# EAGLE board CAN_Steering_Wheel_board (EAGLE 7.6.0)
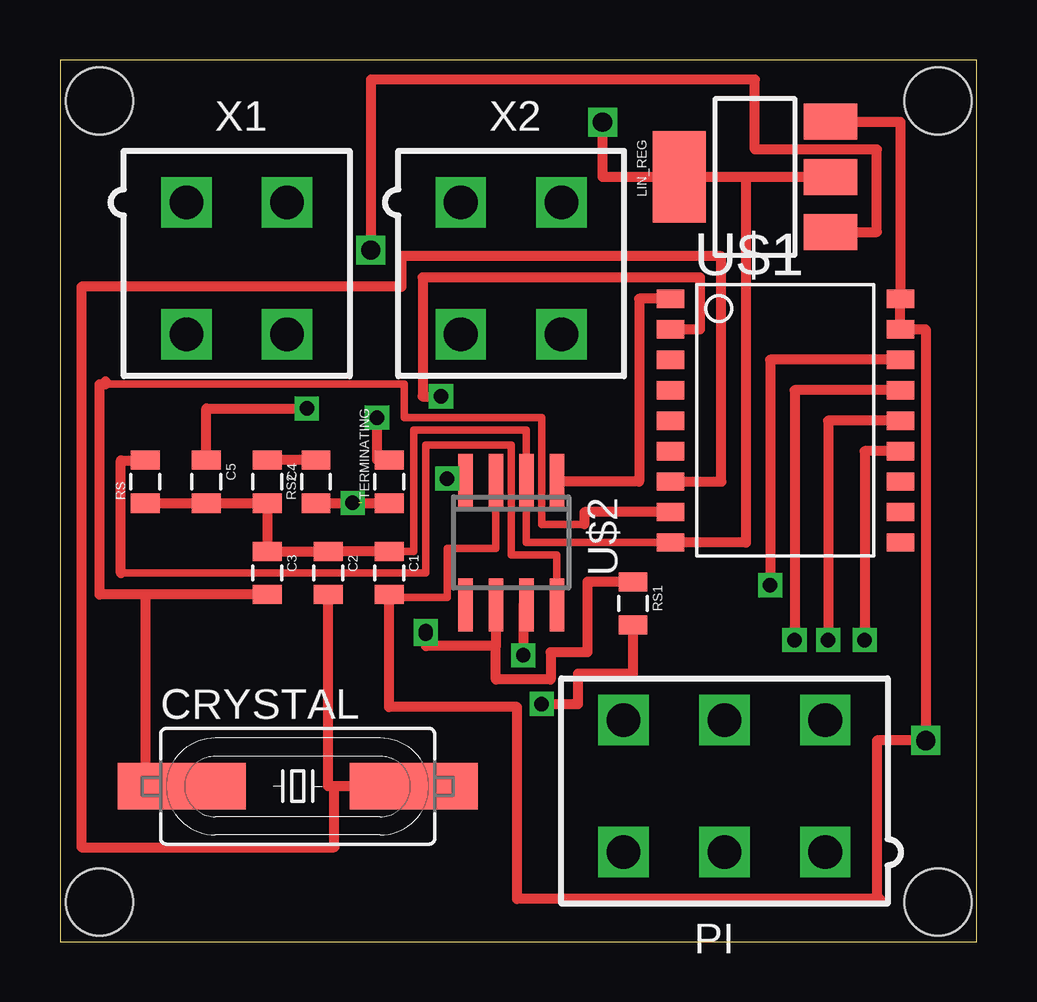
[diagram p0: board, top side]
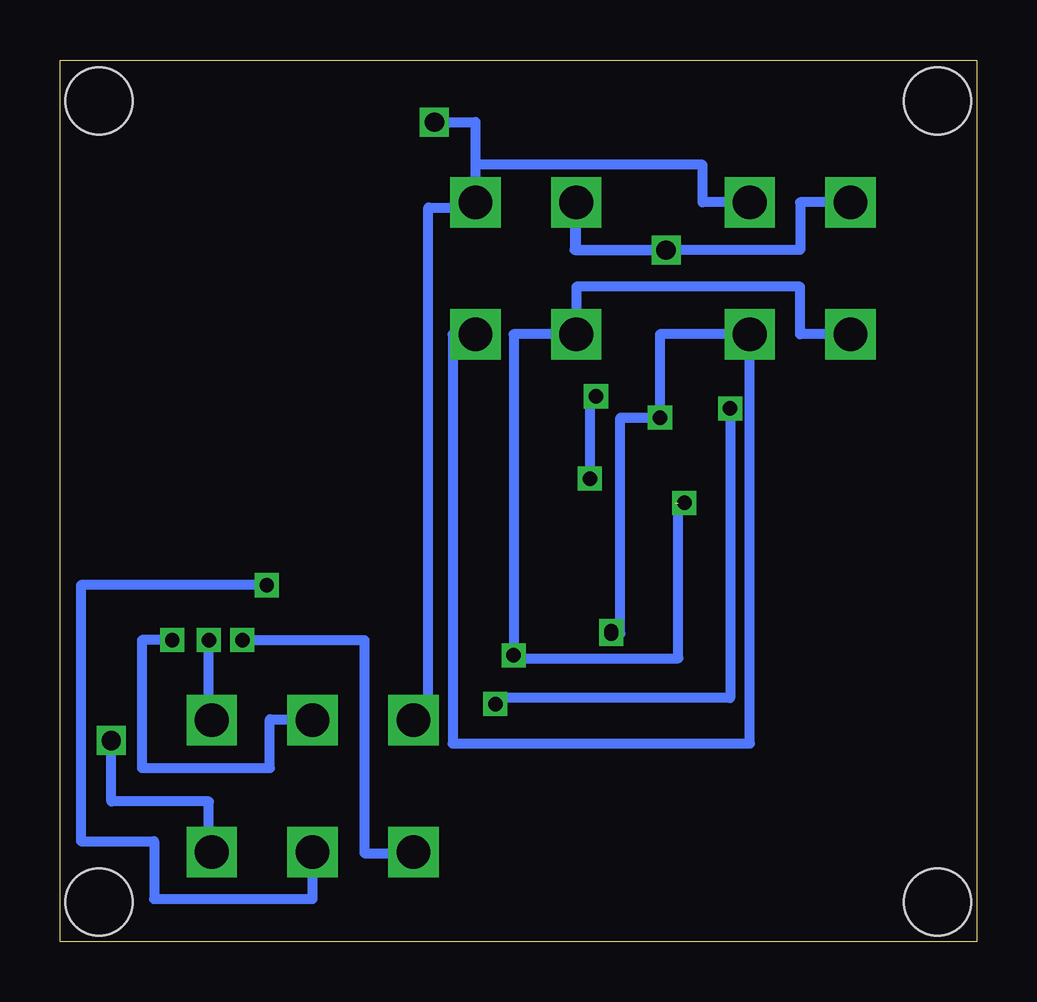
[diagram p1: board, bottom side, seen from below]

Size 38.21 x 36.75 mm. Coordinates in mm from the lower left corner, seen from the top.
Outline: 0,0 38.21,0 38.21,36.75 0,36.75 0,0
Copper layers (1*16): Top 0.035mm / dielectric 1.5mm / Bottom 0.035mm
Design rules "default": minimum track width 10mil, minimum drill 24mil, track to track 8mil, track to pad 8mil, pad to pad 8mil, via to via 8mil, smd to smd 8mil, copper to edge 40mil, drill to drill 8mil, minimum pad ring 10mil, minimum via ring 8mil, stop-mask expansion 4mil, vias tented up to drill 0mil, thermal gap 10mil
Holes 2.8 mm at 1.65,35.05 36.58,35.05 1.65,1.65 36.58,1.65

## Footprints (pad centres in the part's own frame; a part is rotated, then mirrored left to right if it is on the bottom)
0805 = smd 0.8 x 1.2: 1 -0.9,0; 2 0.9,0
HC49UP = smd 5.334 x 1.93: 1 -4.826,0; 2 4.826,0
SOT223 = smd 1.5 x 2.235: 1 -2.3,-3.15; 2 0,-3.15; 3 2.3,-3.15 | smd 3.8 x 2.2: 4 0,3.15
MINIFIT_5566-6 = drill 1.4 square: 1 4.2,-2.75; 2 0,-2.75; 3 -4.2,-2.75; 4 4.2,2.75; 5 0,2.75; 6 -4.2,2.75
SOIC-18W = smd 0.762 x 1.143: 1 -5.08,-4.788; 2 -3.81,-4.788; 3 -2.54,-4.788; 4 -1.27,-4.788; 5 0,-4.788; 6 1.27,-4.788; 7 2.54,-4.788; 8 3.81,-4.788; 9 5.08,-4.788; 10 5.08,4.788; 11 3.81,4.788; 12 2.54,4.788; 13 1.27,4.788; 14 0,4.788; 15 -1.27,4.788; 16 -2.54,4.788; 17 -3.81,4.788; 18 -5.08,4.788
SOIC-08 = smd 0.6 x 2.2: 1 -1.905,-2.6; 2 -0.635,-2.6; 3 0.635,-2.6; 4 1.905,-2.6; 5 1.905,2.6; 6 0.635,2.6; 7 -0.635,2.6; 8 -1.905,2.6
MINIFIT_5566-4 = drill 1.4 square: 1 2.1,-2.75; 2 -2.1,-2.75; 3 2.1,2.75; 4 -2.1,2.75

## Placement (x,y rotation side)
C1  0.1uF  [0805]  13.72,15.37 270 top
C2  22pF  [0805]  11.18,15.37 270 top
C3  22pF  [0805]  8.64,15.37 270 top
C4  560pF  [0805]  8.64,19.18 270 top
C5  560pF  [0805]  6.1,19.18 270 top
CRYSTAL  16MHz  [HC49UP]  9.91,6.48 0 top
LIN_REG  [SOT223]  28.96,31.88 90 top
PI  MINIFIT_5566-6  [MINIFIT_5566-6]  27.69,6.48 0 top
RS  4.7k  [0805]  3.56,19.18 90 top
RS1  100  [0805]  23.88,14.1 270 top
RS2  100  [0805]  10.67,19.18 90 top
TERMINATING  120  [0805]  13.72,19.18 90 top
U$1  MCP2515SMD  [SOIC-18W]  30.23,21.72 270 top
U$2  MCP2551  [SOIC-08]  18.8,16.64 180 top
X1  MINIFIT_5566-4  [MINIFIT_5566-4]  7.37,28.07 180 top
X2  MINIFIT_5566-4  [MINIFIT_5566-4]  18.8,28.07 180 top

## Library data of the parts
C1-C5 CRYSTAL LIN_REG RS RS1 RS2 TERMINATING U$1 U$2 = HyTechDevices
PI = HyTechDevices; MPN: 95566-61002; OC_FARNELL: unknown; OC_NEWARK: 22K8620
X1 X2 = HyTechDevices; OC_FARNELL: unknown; OC_NEWARK: unknown

## Nets
5V: C1.2 LIN_REG.3 PI.1 U$1.17 U$1.18 U$2.3
12V: LIN_REG.1 X1.1 X2.1
CANH: RS2.1 TERMINATING.1 U$2.7 X1.3 X2.3
CANL: RS1.1 TERMINATING.2 U$2.6 X1.4 X2.4
GND: C1.1 C2.1 C3.1 C4.2 C5.2 LIN_REG.2 LIN_REG.4 PI.6 RS.1 U$1.9 U$2.2 X1.2 X2.2
N$1: U$1.1 U$2.1
N$2: U$1.2 U$2.4
N$3: C3.2 CRYSTAL.1 U$1.8
N$4: PI.2 U$1.16
N$5: PI.3 U$1.15
N$6: PI.4 U$1.14
N$7: PI.5 U$1.13
N$8: RS.2 U$2.8
N$9: C2.2 CRYSTAL.2 U$1.7
N$10: C4.1 RS2.2
N$11: C5.1 RS1.2

## Tracks (layer width: path | path; a pad name or v marks a point on that pad's centre or on a via)
5V  (via drill 0.8)
  Top 0.305: U$2.3 18.16,16.38 16.13,16.38 16.13,14.35 13.72,14.35
  Top 0.406: LIN_REG.3 35.01,34.18 U$1.18 U$1.17 36.07,25.53 v36.07,8.38 34.04,8.38 34.04,1.78 | 13.72,14.35 C1.2 13.72,9.78 19.05,9.78 19.05,1.78 34.04,1.78 | 34.16,1.78 34.04,1.78
  Bottom 0.406: PI.1 32,3.73 32,5.84 36.07,5.84 v36.07,8.38
12V  (via drill 0.8)
  Top 0.406: LIN_REG.1 34.04,29.58 34.04,33.02 28.96,33.02 28.96,35.94 12.95,35.94 v12.95,28.83
  Bottom 0.406: X1.1 7.37,30.82 7.37,28.83 v12.95,28.83 | v12.95,28.83 16.7,28.83 X2.1 16.76,30.82 16.76,28.83 v12.95,28.83
CANH  (via drill 0.6)  (1 unrouted)
  Top 0.406: RS2.1 TERMINATING.1 | U$2.7 19.3,14.04 v19.3,11.94
  Bottom 0.406: X1.3 7.37,25.32 7.37,27.31 16.7,27.31 X2.3 19.3,25.32 v19.3,11.94 19.3,11.81 12.45,11.81 12.45,18.28
CANL  (via drill 0.6)
  Top 0.406: RS1.1 21.97,15 21.97,12.07 20.45,12.07 20.45,10.92 18.16,10.92 18.16,12.32 | U$2.6 18.16,12.32 | 18.16,12.32 15.24,12.32 v15.24,12.83 | v13.21,21.84 13.21,20.08 TERMINATING.2
  Bottom 0.406: v15.24,12.83 14.86,12.83 14.86,21.84 v13.21,21.84 13.21,25.32 X1.4 9.47,8.25 21.84,8.25 21.84,25.32 X2.4
GND  (via drill 0.8)
  Top 0.305: U$1.9 19.43,16.64 U$2.2 19.43,21.34 14.73,21.34 14.73,16.27 C1.1
  Top 0.406: LIN_REG.2 28.58,31.88 | 28.58,31.88 28.58,16.64 U$1.9 | RS.1 C5.2 C4.2 C3.1 C2.1 C1.1 | 28.58,31.88 LIN_REG.4 22.61,31.88 v22.61,34.16
  Bottom 0.406: PI.6 22.86,9.23 22.86,30.61 20.9,30.61 X2.2 20.9,32.39 | X1.2 11.43,30.82 11.43,32.39 20.9,32.39 | v22.61,34.16 20.9,34.16 20.9,32.39
N$1
  Top 0.406: U$1.1 24.13,26.8 24.13,19.18 20.7,19.18 U$2.1
N$2  (via drill 0.6)
  Top 0.406: U$1.2 26.67,25.53 26.67,27.69 15.11,27.69 15.11,22.73 v15.88,22.73 | v16.13,19.3 16.76,19.3 U$2.4
  Bottom 0.406: v15.88,22.73 16.13,22.73 v16.13,19.3
N$3
  Top 0.305: 21.84,17.4 20.07,17.4 20.07,21.84 14.35,21.84 14.35,23.24 1.91,23.24
  Top 0.406: CRYSTAL.1 3.56,6.48 3.56,14.47 C3.2 1.65,14.47 1.65,23.24 1.91,23.24 1.91,23.37 | U$1.8 21.84,17.91 21.84,17.4
N$4  (via drill 0.6)
  Top 0.406: U$1.16 29.59,24.26 v29.59,14.86
  Bottom 0.406: v29.59,14.86 37.34,14.86 37.34,4.19 34.29,4.19 34.29,1.78 27.69,1.78 PI.2
N$5  (via drill 0.6)
  Top 0.406: U$1.15 30.61,22.99 v30.61,12.57
  Bottom 0.406: v30.61,12.57 25.53,12.57 25.53,3.68 23.49,3.68 PI.3
N$6  (via drill 0.6)
  Top 0.406: U$1.14 32,21.72 v32,12.57
  Bottom 0.406: PI.4 32,9.23 v32,12.57
N$7  (via drill 0.6)
  Top 0.406: U$1.13 33.53,20.45 v33.53,12.57
  Bottom 0.406: v33.53,12.57 34.8,12.57 34.8,7.24 29.46,7.24 29.46,9.27 27.69,9.27 PI.5
N$8
  Top 0.305: U$2.8 20.7,16.13 18.8,16.13 18.8,20.7 15.24,20.7 15.24,15.37 2.54,15.37
  Top 0.406: 2.54,15.37 2.54,20.07 3.56,20.07 RS.2
N$9
  Top 0.406: CRYSTAL.2 11.43,6.48 | 11.43,6.48 11.18,6.48 C2.2 | U$1.7 27.56,19.18 27.56,28.57 14.22,28.57 14.22,27.31 0.89,27.31 0.89,3.94 11.43,3.94 11.43,6.48
N$10
  Top 0.406: RS2.2 C4.1
N$11  (via drill 0.6)
  Top 0.406: C5.1 6.1,22.22 v10.29,22.22 | v20.07,9.91 21.59,9.91 21.59,11.18 23.88,11.18 RS1.2
  Bottom 0.406: v10.29,22.22 10.29,10.16 20.07,10.16 v20.07,9.91
N$13  (via drill 0.6)
  other vias: 12.19,18.29
N$14  (via drill 0.6)
  other vias: 15.24,12.95